# Altium PCB PCB1.PcbDoc (part 3 of 3)
Units mil, origin at the board's own origin, x right, y up, seen from the top; angles counter-clockwise.
Board outline 1929.13 x 1929.13 mil, 2 copper layers (Top Layer, Bottom Layer); 46 components, 43 nets, 184 pads, 94 vias.
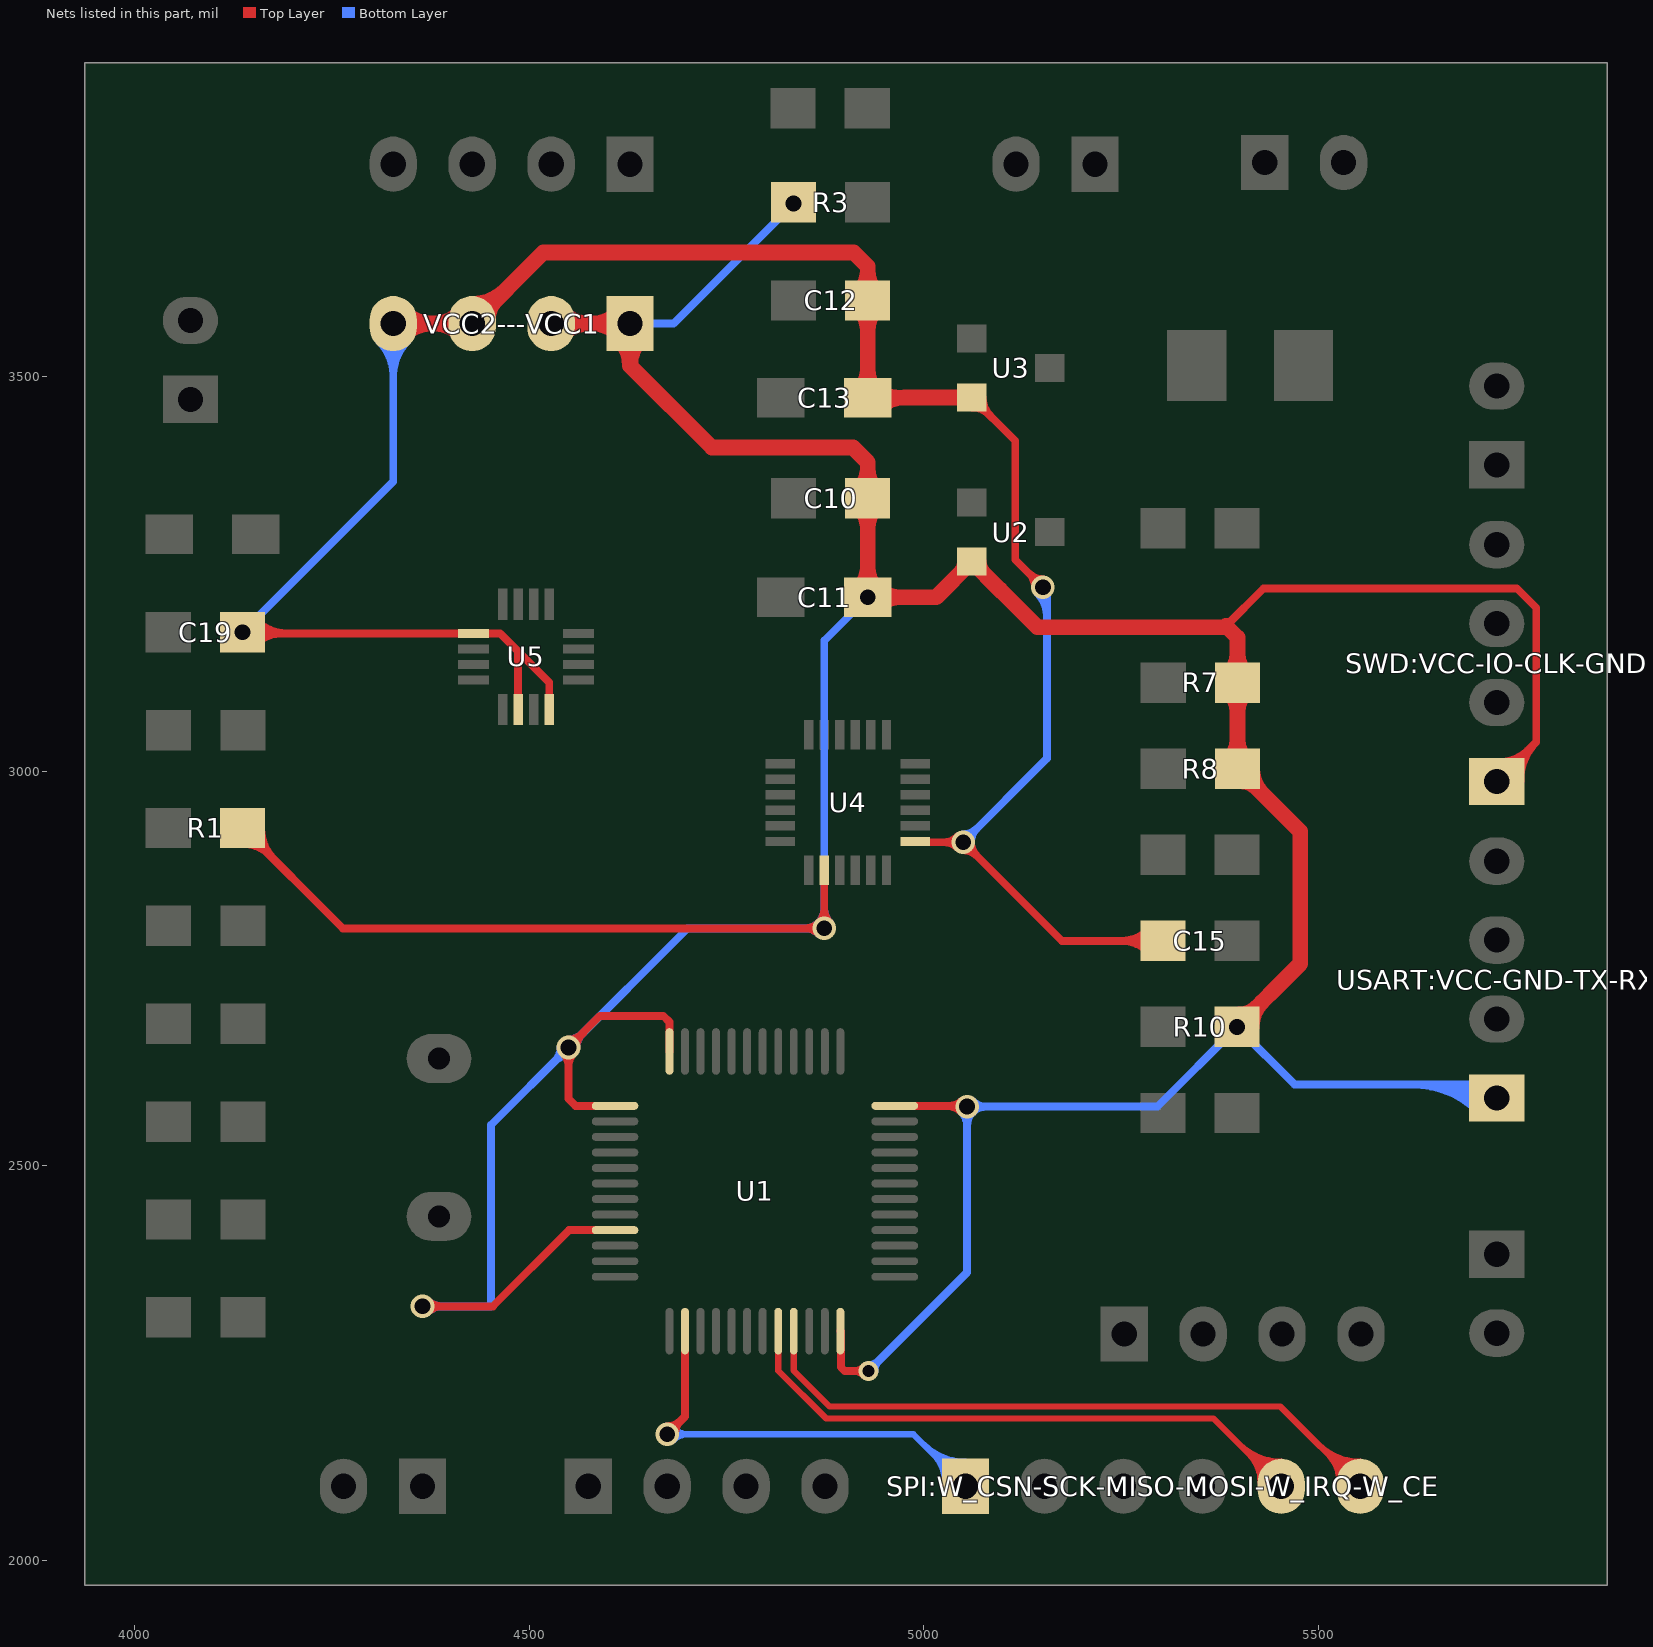
[diagram p3: the nets of this part, all layers, seen from the top]

## Via types
v1: diameter 30, hole 20, Top Layer to Bottom Layer, 54 vias
v2: diameter 19.68, hole 19.68, Top Layer to Bottom Layer, 32 vias
v3: diameter 25, hole 15, Top Layer to Bottom Layer, 4 vias
v4: diameter 196.85, hole 137.8, Top Layer to Bottom Layer, 4 vias

## Nets (pads, with @x,y where several pads share a name; then routed paths per layer and width w, separated by ;. In a path a pad name is that pad's centre, name@x,y a point inside that pad or via, vN(x,y) a via of type N, cw(c..) or ccw(c..) an arc to the next point about the centre after c; other vN are vias at no path point) (continued)
VCC1: C10.2 C11.A R1.1 R3.1 R7.2 R8.2 R10.1 SWD:VCC-IO-CLK-GND.1 U1.1 U1.9 U1.24 U1.36 U1.48 U2.2 U4.8 USART:VCC-GND-TX-RX.1 VCC2---VCC1.1 VCC2---VCC1.2 | length 16163
  Top Layer w10: R1.1@4137,2928 4264.08,2800.92 v1(4874.08,2800.92) U4.8@4874.08,2874.59 ; v1(4365,2322) 4454.12,2322 4550.64,2418.52 U1.9@4609,2418.52 ; U1.1@4609,2576 4559,2576 4550,2585 v1(4550,2650) 4590,2690 4670,2690 4677.9,2682.1 U1.48@4677.9,2644.9 ; U1.24@4894.43,2290.57 4895,2290 4895,2245 4900,2240 v3(4930,2240) ; U1.36@4963.33,2576 v1@5054,2576 ; U2.2@5061,3265.53 U2.2@5068.25,3258.28 ; 5383,3184 5430.66,3231.66 5751.34,3231.66 5776,3207 5776,3037 ; SWD:VCC-IO-CLK-GND.1@5726,2987 5776,3037 ; R1.1@4139.95,2907.41 cw(c4139.95,2864.83) 4170.06,2894.94 ; R1.1@4139.95,2907.41 cw(c4139.95,2864.83) 4170.06,2894.94 ; R1.1@4139.95,2907.41 cw(c4139.95,2864.83) 4170.06,2894.94 ; R1.1@4139.95,2907.41 cw(c4139.95,2864.83) 4170.06,2894.94 ; R1.1@4150.54,2928 ccw(c4183.24,2928) R1.1@4160.12,2904.88 ; R1.1@4150.54,2928 ccw(c4183.24,2928) R1.1@4160.12,2904.88 ; R1.1@4150.54,2928 ccw(c4183.24,2928) R1.1@4160.12,2904.88 ; R1.1@4150.54,2928 ccw(c4183.24,2928) R1.1@4160.12,2904.88 ; R1.1@4160.54,2928 ccw(c4217.38,2928) 4177.19,2887.81 ; R1.1@4160.54,2928 ccw(c4217.38,2928) 4177.19,2887.81 ; R1.1@4160.54,2928 ccw(c4217.38,2928) 4177.19,2887.81 ; R1.1@4160.54,2928 ccw(c4217.38,2928) 4177.19,2887.81 ; v1@4372.07,2314.93 cw(c4389.14,2297.86) 4389.14,2322 ; v1@4372.07,2314.93 cw(c4389.14,2297.86) 4389.14,2322 ; v1@4372.07,2314.93 cw(c4389.14,2297.86) 4389.14,2322 ; v1@4372.07,2314.93 cw(c4389.14,2297.86) 4389.14,2322 ; v1@4372.07,2329.07 ccw(c4389.14,2346.14) 4389.14,2322 ; v1@4372.07,2329.07 ccw(c4389.14,2346.14) 4389.14,2322 ; v1@4372.07,2329.07 ccw(c4389.14,2346.14) 4389.14,2322 ; v1@4372.07,2329.07 ccw(c4389.14,2346.14) 4389.14,2322 ; v1@4542.93,2642.93 cw(c4525.86,2625.86) 4550,2625.86 ; v1@4542.93,2642.93 cw(c4525.86,2625.86) 4550,2625.86 ; v1@4542.93,2642.93 cw(c4525.86,2625.86) 4550,2625.86 ; v1@4542.93,2642.93 cw(c4525.86,2625.86) 4550,2625.86 ; 4550,2625.86 cw(c4574.14,2625.86) v1@4557.07,2642.93 ; 4550,2625.86 cw(c4574.14,2625.86) v1@4557.07,2642.93 ; 4550,2625.86 cw(c4574.14,2625.86) v1@4557.07,2642.93 ; 4550,2625.86 cw(c4574.14,2625.86) v1@4557.07,2642.93 ; 4550,2631.89 cw(c4568.11,2631.89) v1@4555.3,2644.7 ; 4550,2631.89 cw(c4568.11,2631.89) v1@4555.3,2644.7 ; 4550,2631.89 cw(c4568.11,2631.89) v1@4555.3,2644.7 ; 4550,2631.89 cw(c4568.11,2631.89) v1@4555.3,2644.7 ; v1@4550,2657.5 ccw(c4550,2675.61) 4562.8,2662.8 ; v1@4550,2657.5 ccw(c4550,2675.61) 4562.8,2662.8 ; v1@4550,2657.5 ccw(c4550,2675.61) 4562.8,2662.8 ; v1@4550,2657.5 ccw(c4550,2675.61) 4562.8,2662.8 ; v1@4550,2660 ccw(c4550,2684.14) 4567.07,2667.07 ; v1@4550,2660 ccw(c4550,2684.14) 4567.07,2667.07 ; v1@4550,2660 ccw(c4550,2684.14) 4567.07,2667.07 ; v1@4550,2660 ccw(c4550,2684.14) 4567.07,2667.07 ; v1@4557.5,2650 cw(c4575.61,2650) 4562.8,2662.8 ; v1@4557.5,2650 cw(c4575.61,2650) 4562.8,2662.8 ; v1@4557.5,2650 cw(c4575.61,2650) 4562.8,2662.8 ; v1@4557.5,2650 cw(c4575.61,2650) 4562.8,2662.8 ; v1@4560,2650 cw(c4584.14,2650) 4567.07,2667.07 ; v1@4560,2650 cw(c4584.14,2650) 4567.07,2667.07 ; v1@4560,2650 cw(c4584.14,2650) 4567.07,2667.07 ; v1@4560,2650 cw(c4584.14,2650) 4567.07,2667.07 ; 4849.94,2800.92 cw(c4849.94,2776.78) v1@4867.01,2793.85 ; 4849.94,2800.92 ccw(c4849.94,2825.06) v1@4867.01,2807.99 ; 4849.94,2800.92 cw(c4849.94,2776.78) v1@4867.01,2793.85 ; 4849.94,2800.92 ccw(c4849.94,2825.06) v1@4867.01,2807.99 ; 4849.94,2800.92 ccw(c4849.94,2825.06) v1@4867.01,2807.99 ; 4849.94,2800.92 cw(c4849.94,2776.78) v1@4867.01,2793.85 ; 4849.94,2800.92 ccw(c4849.94,2825.06) v1@4867.01,2807.99 ; 4849.94,2800.92 cw(c4849.94,2776.78) v1@4867.01,2793.85 ; v1@4867.01,2807.99 ccw(c4849.94,2825.06) 4874.08,2825.06 ; v1@4867.01,2807.99 ccw(c4849.94,2825.06) 4874.08,2825.06 ; v1@4867.01,2807.99 ccw(c4849.94,2825.06) 4874.08,2825.06 ; v1@4867.01,2807.99 ccw(c4849.94,2825.06) 4874.08,2825.06 ; 4874.08,2825.06 ccw(c4898.22,2825.06) v1@4881.15,2807.99 ; 4874.08,2825.06 ccw(c4898.22,2825.06) v1@4881.15,2807.99 ; 4874.08,2825.06 ccw(c4898.22,2825.06) v1@4881.15,2807.99 ; 4874.08,2825.06 ccw(c4898.22,2825.06) v1@4881.15,2807.99 ; 4911.89,2240 cw(c4911.89,2221.89) v3@4924.7,2234.7 ; 4911.89,2240 ccw(c4911.89,2258.11) v3@4924.7,2245.3 ; 4911.89,2240 cw(c4911.89,2221.89) v3@4924.7,2234.7 ; 4911.89,2240 ccw(c4911.89,2258.11) v3@4924.7,2245.3 ; 4911.89,2240 cw(c4911.89,2221.89) v3@4924.7,2234.7 ; 4911.89,2240 ccw(c4911.89,2258.11) v3@4924.7,2245.3 ; 4911.89,2240 cw(c4911.89,2221.89) v3@4924.7,2234.7 ; 4911.89,2240 ccw(c4911.89,2258.11) v3@4924.7,2245.3 ; 4911.89,2240 cw(c4911.89,2221.89) v3@4924.7,2234.7 ; 4911.89,2240 ccw(c4911.89,2258.11) v3@4924.7,2245.3 ; 4911.89,2240 cw(c4911.89,2221.89) v3@4924.7,2234.7 ; 4911.89,2240 ccw(c4911.89,2258.11) v3@4924.7,2245.3 ; 4911.89,2240 ccw(c4911.89,2258.11) v3@4924.7,2245.3 ; 4911.89,2240 cw(c4911.89,2221.89) v3@4924.7,2234.7 ; 4911.89,2240 ccw(c4911.89,2258.11) v3@4924.7,2245.3 ; 4911.89,2240 cw(c4911.89,2221.89) v3@4924.7,2234.7 ; 5028.44,2576 cw(c5028.44,2548.44) v1@5047.93,2567.93 ; 5028.44,2576 cw(c5028.44,2548.44) v1@5047.93,2567.93 ; 5028.44,2576 cw(c5028.44,2548.44) v1@5047.93,2567.93 ; 5028.44,2576 cw(c5028.44,2548.44) v1@5047.93,2567.93 ; 5033.27,2576 ccw(c5033.27,2596.73) v1@5047.93,2582.07 ; 5033.27,2576 ccw(c5033.27,2596.73) v1@5047.93,2582.07 ; 5033.27,2576 ccw(c5033.27,2596.73) v1@5047.93,2582.07 ; 5033.27,2576 ccw(c5033.27,2596.73) v1@5047.93,2582.07 ; 5034.48,2576 cw(c5034.48,2554.48) v1@5049.7,2569.7 ; 5034.48,2576 cw(c5034.48,2554.48) v1@5049.7,2569.7 ; 5034.48,2576 cw(c5034.48,2554.48) v1@5049.7,2569.7 ; 5034.48,2576 cw(c5034.48,2554.48) v1@5049.7,2569.7 ; 5039.31,2576 ccw(c5039.31,2590.69) v1@5049.7,2580.3 ; 5039.31,2576 ccw(c5039.31,2590.69) v1@5049.7,2580.3 ; 5039.31,2576 ccw(c5039.31,2590.69) v1@5049.7,2580.3 ; 5039.31,2576 ccw(c5039.31,2590.69) v1@5049.7,2580.3 ; SWD:VCC-IO-CLK-GND.1@5726,3007 ccw(c5726,3055.28) 5760.14,3021.14 ; SWD:VCC-IO-CLK-GND.1@5726,3007 ccw(c5726,3055.28) 5760.14,3021.14 ; SWD:VCC-IO-CLK-GND.1@5726,3007 ccw(c5726,3055.28) 5760.14,3021.14 ; SWD:VCC-IO-CLK-GND.1@5726,3007 ccw(c5726,3055.28) 5760.14,3021.14 ; SWD:VCC-IO-CLK-GND.1@5731,3012 ccw(c5731,3060.28) 5765.14,3026.14 ; SWD:VCC-IO-CLK-GND.1@5731,3012 ccw(c5731,3060.28) 5765.14,3026.14 ; SWD:VCC-IO-CLK-GND.1@5731,3012 ccw(c5731,3060.28) 5765.14,3026.14 ; SWD:VCC-IO-CLK-GND.1@5731,3012 ccw(c5731,3060.28) 5765.14,3026.14 ; SWD:VCC-IO-CLK-GND.1@5746,2987 cw(c5794.28,2987) 5760.14,3021.14 ; SWD:VCC-IO-CLK-GND.1@5746,2987 cw(c5794.28,2987) 5760.14,3021.14 ; SWD:VCC-IO-CLK-GND.1@5746,2987 cw(c5794.28,2987) 5760.14,3021.14 ; SWD:VCC-IO-CLK-GND.1@5746,2987 cw(c5794.28,2987) 5760.14,3021.14 ; SWD:VCC-IO-CLK-GND.1@5746,2987.27 cw(c5791.61,2988.09) 5759.35,3020.35 ; SWD:VCC-IO-CLK-GND.1@5746,2987.27 cw(c5791.61,2988.09) 5759.35,3020.35 ; SWD:VCC-IO-CLK-GND.1@5746,2987.27 cw(c5791.61,2988.09) 5759.35,3020.35 ; SWD:VCC-IO-CLK-GND.1@5746,2987.27 cw(c5791.61,2988.09) 5759.35,3020.35 ; SWD:VCC-IO-CLK-GND.1@5756,2987.45 cw(c5824.31,2988.68) 5776,3037 ; SWD:VCC-IO-CLK-GND.1@5756,2987.45 cw(c5824.31,2988.68) 5776,3037 ; SWD:VCC-IO-CLK-GND.1@5756,2987.45 cw(c5824.31,2988.68) 5776,3037 ; SWD:VCC-IO-CLK-GND.1@5756,2987.45 cw(c5824.31,2988.68) 5776,3037
  Top Layer w20: VCC2---VCC1.2@4528,3567 VCC2---VCC1.1@4628,3567 ; 4910.33,3410 4731.72,3410 4628,3513.72 ; 4912,3408.33 4929.06,3391.27 C10.2@4929.06,3345.67 v1(4929.06,3220.33) ; 5381.33,3182.33 5144.2,3182.33 5104.28,3222.25 5096.54,3229.99 U2.2@5061,3265.53 5015.8,3220.33 4969.65,3220.33 ; 5383,3184 5397.57,3169.43 R7.2@5397.57,3112 R8.2@5397.57,3003 5477,2923.57 5477,2756 v1(5397,2676) ; VCC2---VCC1.2@4542.14,3552.86 cw(c4576.28,3518.72) 4576.28,3567 ; VCC2---VCC1.2@4542.14,3552.86 cw(c4576.28,3518.72) 4576.28,3567 ; VCC2---VCC1.2@4542.14,3552.86 cw(c4576.28,3518.72) 4576.28,3567 ; VCC2---VCC1.2@4542.14,3552.86 cw(c4576.28,3518.72) 4576.28,3567 ; VCC2---VCC1.2@4542.14,3552.86 cw(c4576.28,3518.72) 4576.28,3567 ; VCC2---VCC1.2@4542.14,3552.86 cw(c4576.28,3518.72) 4576.28,3567 ; VCC2---VCC1.2@4542.14,3552.86 cw(c4576.28,3518.72) 4576.28,3567 ; VCC2---VCC1.2@4542.14,3552.86 cw(c4576.28,3518.72) 4576.28,3567 ; VCC2---VCC1.2@4542.14,3581.14 ccw(c4576.28,3615.28) 4576.28,3567 ; VCC2---VCC1.2@4542.14,3581.14 ccw(c4576.28,3615.28) 4576.28,3567 ; VCC2---VCC1.2@4542.14,3581.14 ccw(c4576.28,3615.28) 4576.28,3567 ; VCC2---VCC1.2@4542.14,3581.14 ccw(c4576.28,3615.28) 4576.28,3567 ; VCC2---VCC1.2@4542.14,3581.14 ccw(c4576.28,3615.28) 4576.28,3567 ; VCC2---VCC1.2@4542.14,3581.14 ccw(c4576.28,3615.28) 4576.28,3567 ; VCC2---VCC1.2@4542.14,3581.14 ccw(c4576.28,3615.28) 4576.28,3567 ; VCC2---VCC1.2@4542.14,3581.14 ccw(c4576.28,3615.28) 4576.28,3567 ; 4579.72,3567 cw(c4579.72,3518.72) VCC2---VCC1.1@4613.86,3552.86 ; 4579.72,3567 ccw(c4579.72,3615.28) VCC2---VCC1.1@4613.86,3581.14 ; 4579.72,3567 cw(c4579.72,3518.72) VCC2---VCC1.1@4613.86,3552.86 ; 4579.72,3567 ccw(c4579.72,3615.28) VCC2---VCC1.1@4613.86,3581.14 ; 4579.72,3567 cw(c4579.72,3518.72) VCC2---VCC1.1@4613.86,3552.86 ; 4579.72,3567 ccw(c4579.72,3615.28) VCC2---VCC1.1@4613.86,3581.14 ; 4579.72,3567 cw(c4579.72,3518.72) VCC2---VCC1.1@4613.86,3552.86 ; 4579.72,3567 ccw(c4579.72,3615.28) VCC2---VCC1.1@4613.86,3581.14 ; 4579.72,3567 cw(c4579.72,3518.72) VCC2---VCC1.1@4613.86,3552.86 ; 4579.72,3567 ccw(c4579.72,3615.28) VCC2---VCC1.1@4613.86,3581.14 ; 4579.72,3567 cw(c4579.72,3518.72) VCC2---VCC1.1@4613.86,3552.86 ; 4579.72,3567 ccw(c4579.72,3615.28) VCC2---VCC1.1@4613.86,3581.14 ; 4579.72,3567 ccw(c4579.72,3615.28) VCC2---VCC1.1@4613.86,3581.14 ; 4579.72,3567 cw(c4579.72,3518.72) VCC2---VCC1.1@4613.86,3552.86 ; 4579.72,3567 ccw(c4579.72,3615.28) VCC2---VCC1.1@4613.86,3581.14 ; 4579.72,3567 cw(c4579.72,3518.72) VCC2---VCC1.1@4613.86,3552.86 ; VCC2---VCC1.1@4613.86,3547.86 cw(c4579.72,3513.72) 4628,3513.72 ; VCC2---VCC1.1@4613.86,3547.86 cw(c4579.72,3513.72) 4628,3513.72 ; VCC2---VCC1.1@4613.86,3547.86 cw(c4579.72,3513.72) 4628,3513.72 ; VCC2---VCC1.1@4613.86,3547.86 cw(c4579.72,3513.72) 4628,3513.72 ; 4628,3513.72 cw(c4676.28,3513.72) VCC2---VCC1.1@4642.14,3547.86 ; 4628,3513.72 cw(c4676.28,3513.72) VCC2---VCC1.1@4642.14,3547.86 ; 4628,3513.72 cw(c4676.28,3513.72) VCC2---VCC1.1@4642.14,3547.86 ; 4628,3513.72 cw(c4676.28,3513.72) VCC2---VCC1.1@4642.14,3547.86 ; C11.A@4918.04,3231.36 ccw(c4891.42,3257.97) 4929.06,3257.97 ; C11.A@4918.04,3231.36 ccw(c4891.42,3257.97) 4929.06,3257.97 ; C11.A@4918.04,3231.36 ccw(c4891.42,3257.97) 4929.06,3257.97 ; C11.A@4918.04,3231.36 ccw(c4891.42,3257.97) 4929.06,3257.97 ; C10.2@4918.04,3334.64 cw(c4891.42,3308.03) 4929.06,3308.03 ; C10.2@4918.04,3334.64 cw(c4891.42,3308.03) 4929.06,3308.03 ; C10.2@4918.04,3334.64 cw(c4891.42,3308.03) 4929.06,3308.03 ; C10.2@4918.04,3334.64 cw(c4891.42,3308.03) 4929.06,3308.03 ; C10.2@4918.04,3356.69 ccw(c4891.42,3383.31) 4929.06,3383.31 ; C10.2@4918.04,3356.69 ccw(c4891.42,3383.31) 4929.06,3383.31 ; C10.2@4918.04,3356.69 ccw(c4891.42,3383.31) 4929.06,3383.31 ; C10.2@4918.04,3356.69 ccw(c4891.42,3383.31) 4929.06,3383.31 ; 4929.06,3257.97 ccw(c4966.7,3257.97) C11.A@4940.09,3231.36 ; 4929.06,3257.97 ccw(c4966.7,3257.97) C11.A@4940.09,3231.36 ; 4929.06,3257.97 ccw(c4966.7,3257.97) C11.A@4940.09,3231.36 ; 4929.06,3257.97 ccw(c4966.7,3257.97) C11.A@4940.09,3231.36 ; 4929.06,3308.03 cw(c4966.7,3308.03) C10.2@4940.09,3334.64 ; 4929.06,3308.03 cw(c4966.7,3308.03) C10.2@4940.09,3334.64 ; 4929.06,3308.03 cw(c4966.7,3308.03) C10.2@4940.09,3334.64 ; 4929.06,3308.03 cw(c4966.7,3308.03) C10.2@4940.09,3334.64 ; 4929.06,3383.31 ccw(c4966.7,3383.31) C10.2@4940.09,3356.69 ; 4929.06,3383.31 ccw(c4966.7,3383.31) C10.2@4940.09,3356.69 ; 4929.06,3383.31 ccw(c4966.7,3383.31) C10.2@4940.09,3356.69 ; 4929.06,3383.31 ccw(c4966.7,3383.31) C10.2@4940.09,3356.69 ; C11.A@4943.04,3209.31 cw(c4969.65,3182.69) 4969.65,3220.33 ; C11.A@4943.04,3209.31 cw(c4969.65,3182.69) 4969.65,3220.33 ; C11.A@4943.04,3209.31 cw(c4969.65,3182.69) 4969.65,3220.33 ; C11.A@4943.04,3231.36 ccw(c4969.65,3257.97) 4969.65,3220.33 ; C11.A@4943.04,3231.36 ccw(c4969.65,3257.97) 4969.65,3220.33 ; C11.A@4943.04,3231.36 ccw(c4969.65,3257.97) 4969.65,3220.33 ; U2.2@5046.15,3250.68 ccw(c5031.29,3265.53) U2.2@5052.3,3265.53 ; U2.2@5046.15,3250.68 ccw(c5031.29,3265.53) U2.2@5052.3,3265.53 ; U2.2@5046.15,3250.68 ccw(c5031.29,3265.53) U2.2@5052.3,3265.53 ; U2.2@5046.15,3250.68 ccw(c5031.29,3265.53) U2.2@5052.3,3265.53 ; U2.2@5069.7,3265.53 ccw(c5090.71,3265.53) U2.2@5075.85,3250.68 ; U2.2@5069.7,3265.53 ccw(c5090.71,3265.53) U2.2@5075.85,3250.68 ; U2.2@5069.7,3265.53 ccw(c5090.71,3265.53) U2.2@5075.85,3250.68 ; U2.2@5069.7,3265.53 ccw(c5090.71,3265.53) U2.2@5075.85,3250.68 ; U2.2@5069.7,3265.53 ccw(c5090.71,3265.53) U2.2@5075.85,3250.68 ; U2.2@5069.7,3265.53 ccw(c5090.71,3265.53) U2.2@5075.85,3250.68 ; U2.2@5069.7,3265.53 ccw(c5090.71,3265.53) U2.2@5075.85,3250.68 ; U2.2@5069.7,3265.53 ccw(c5090.71,3265.53) U2.2@5075.85,3250.68 ; R8.2@5386.54,3014.02 ccw(c5359.93,3040.64) 5397.57,3040.64 ; R8.2@5386.54,3014.02 ccw(c5359.93,3040.64) 5397.57,3040.64 ; R8.2@5386.54,3014.02 ccw(c5359.93,3040.64) 5397.57,3040.64 ; R8.2@5386.54,3014.02 ccw(c5359.93,3040.64) 5397.57,3040.64 ; R7.2@5386.54,3100.98 cw(c5359.93,3074.36) 5397.57,3074.36 ; R7.2@5386.54,3100.98 cw(c5359.93,3074.36) 5397.57,3074.36 ; R7.2@5386.54,3100.98 cw(c5359.93,3074.36) 5397.57,3074.36 ; R7.2@5386.54,3100.98 cw(c5359.93,3074.36) 5397.57,3074.36 ; R7.2@5386.54,3123.02 ccw(c5359.93,3149.64) 5397.57,3149.64 ; R7.2@5386.54,3123.02 ccw(c5359.93,3149.64) 5397.57,3149.64 ; R7.2@5386.54,3123.02 ccw(c5359.93,3149.64) 5397.57,3149.64 ; R7.2@5386.54,3123.02 ccw(c5359.93,3149.64) 5397.57,3149.64 ; 5397.57,3040.64 ccw(c5435.2,3040.64) R8.2@5408.59,3014.02 ; 5397.57,3040.64 ccw(c5435.2,3040.64) R8.2@5408.59,3014.02 ; 5397.57,3040.64 ccw(c5435.2,3040.64) R8.2@5408.59,3014.02 ; 5397.57,3040.64 ccw(c5435.2,3040.64) R8.2@5408.59,3014.02 ; 5397.57,3074.36 cw(c5435.2,3074.36) R7.2@5408.59,3100.98 ; 5397.57,3074.36 cw(c5435.2,3074.36) R7.2@5408.59,3100.98 ; 5397.57,3074.36 cw(c5435.2,3074.36) R7.2@5408.59,3100.98 ; 5397.57,3074.36 cw(c5435.2,3074.36) R7.2@5408.59,3100.98 ; 5397.57,3149.64 ccw(c5435.2,3149.64) R7.2@5408.59,3123.02 ; 5397.57,3149.64 ccw(c5435.2,3149.64) R7.2@5408.59,3123.02 ; 5397.57,3149.64 ccw(c5435.2,3149.64) R7.2@5408.59,3123.02 ; 5397.57,3149.64 ccw(c5435.2,3149.64) R7.2@5408.59,3123.02 ; R10.1@5399.95,2691.59 ccw(c5399.95,2722.1) R10.1@5421.53,2700.53 ; R10.1@5399.95,2691.59 ccw(c5399.95,2722.1) R10.1@5421.53,2700.53 ; R10.1@5399.95,2691.59 ccw(c5399.95,2722.1) R10.1@5421.53,2700.53 ; R10.1@5399.95,2691.59 ccw(c5399.95,2722.1) R10.1@5421.53,2700.53 ; R8.2@5400.52,2987.41 cw(c5400.52,2956.9) R8.2@5422.09,2978.47 ; R8.2@5400.52,2987.41 cw(c5400.52,2956.9) R8.2@5422.09,2978.47 ; R8.2@5400.52,2987.41 cw(c5400.52,2956.9) R8.2@5422.09,2978.47 ; R8.2@5400.52,2987.41 cw(c5400.52,2956.9) R8.2@5422.09,2978.47 ; R10.1@5415.54,2676 cw(c5460.31,2676) 5428.66,2707.66 ; R10.1@5415.54,2676 cw(c5460.31,2676) 5428.66,2707.66 ; R10.1@5415.54,2676 cw(c5460.31,2676) 5428.66,2707.66 ; R10.1@5415.54,2676 cw(c5460.31,2676) 5428.66,2707.66 ; R8.2@5416.11,3003 ccw(c5460.88,3003) 5429.22,2971.34 ; R8.2@5416.11,3003 ccw(c5460.88,3003) 5429.22,2971.34 ; R8.2@5416.11,3003 ccw(c5460.88,3003) 5429.22,2971.34 ; R8.2@5416.11,3003 ccw(c5460.88,3003) 5429.22,2971.34
  Bottom Layer w10: v1(4365,2322) 4452,2322 4452,2552 v1(4550,2650) 4700.92,2800.92 v1(4874.08,2800.92) 4874.08,3165.35 4911.99,3203.26 ; VCC2---VCC1.1@4628,3567 4683,3567 v1(4835,3719) ; v3(4930,2240) 5055,2365 v1(5055,2575) 5296,2575 v1(5397,2676) 5470,2603 5709,2603 USART:VCC-GND-TX-RX.1@5726,2586 ; v1@4372.07,2314.93 cw(c4389.14,2297.86) 4389.14,2322 ; v1@4372.07,2314.93 cw(c4389.14,2297.86) 4389.14,2322 ; v1@4372.07,2314.93 cw(c4389.14,2297.86) 4389.14,2322 ; v1@4372.07,2314.93 cw(c4389.14,2297.86) 4389.14,2322 ; v1@4372.07,2329.07 ccw(c4389.14,2346.14) 4389.14,2322 ; v1@4372.07,2329.07 ccw(c4389.14,2346.14) 4389.14,2322 ; v1@4372.07,2329.07 ccw(c4389.14,2346.14) 4389.14,2322 ; v1@4372.07,2329.07 ccw(c4389.14,2346.14) 4389.14,2322 ; 4532.93,2632.93 cw(c4550,2615.86) v1@4550,2640 ; 4532.93,2632.93 ccw(c4515.86,2650) v1@4540,2650 ; 4532.93,2632.93 cw(c4550,2615.86) v1@4550,2640 ; 4532.93,2632.93 ccw(c4515.86,2650) v1@4540,2650 ; 4532.93,2632.93 ccw(c4515.86,2650) v1@4540,2650 ; 4532.93,2632.93 cw(c4550,2615.86) v1@4550,2640 ; 4532.93,2632.93 ccw(c4515.86,2650) v1@4540,2650 ; 4532.93,2632.93 cw(c4550,2615.86) v1@4550,2640 ; v1@4550,2657.5 ccw(c4550,2675.61) 4562.8,2662.8 ; v1@4550,2657.5 ccw(c4550,2675.61) 4562.8,2662.8 ; v1@4550,2657.5 ccw(c4550,2675.61) 4562.8,2662.8 ; v1@4550,2657.5 ccw(c4550,2675.61) 4562.8,2662.8 ; v1@4550,2660 ccw(c4550,2684.14) 4567.07,2667.07 ; v1@4550,2660 ccw(c4550,2684.14) 4567.07,2667.07 ; v1@4550,2660 ccw(c4550,2684.14) 4567.07,2667.07 ; v1@4550,2660 ccw(c4550,2684.14) 4567.07,2667.07 ; v1@4557.5,2650 cw(c4575.61,2650) 4562.8,2662.8 ; v1@4557.5,2650 cw(c4575.61,2650) 4562.8,2662.8 ; v1@4557.5,2650 cw(c4575.61,2650) 4562.8,2662.8 ; v1@4557.5,2650 cw(c4575.61,2650) 4562.8,2662.8 ; v1@4560,2650 cw(c4584.14,2650) 4567.07,2667.07 ; v1@4560,2650 cw(c4584.14,2650) 4567.07,2667.07 ; v1@4560,2650 cw(c4584.14,2650) 4567.07,2667.07 ; v1@4560,2650 cw(c4584.14,2650) 4567.07,2667.07 ; 4849.94,2800.92 cw(c4849.94,2776.78) v1@4867.01,2793.85 ; 4849.94,2800.92 ccw(c4849.94,2825.06) v1@4867.01,2807.99 ; 4849.94,2800.92 cw(c4849.94,2776.78) v1@4867.01,2793.85 ; 4849.94,2800.92 ccw(c4849.94,2825.06) v1@4867.01,2807.99 ; 4849.94,2800.92 ccw(c4849.94,2825.06) v1@4867.01,2807.99 ; 4849.94,2800.92 cw(c4849.94,2776.78) v1@4867.01,2793.85 ; 4849.94,2800.92 ccw(c4849.94,2825.06) v1@4867.01,2807.99 ; 4849.94,2800.92 cw(c4849.94,2776.78) v1@4867.01,2793.85 ; v1@4867.01,2807.99 ccw(c4849.94,2825.06) 4874.08,2825.06 ; v1@4867.01,2807.99 ccw(c4849.94,2825.06) 4874.08,2825.06 ; v1@4867.01,2807.99 ccw(c4849.94,2825.06) 4874.08,2825.06 ; v1@4867.01,2807.99 ccw(c4849.94,2825.06) 4874.08,2825.06 ; 4874.08,2825.06 ccw(c4898.22,2825.06) v1@4881.15,2807.99 ; 4874.08,2825.06 ccw(c4898.22,2825.06) v1@4881.15,2807.99 ; 4874.08,2825.06 ccw(c4898.22,2825.06) v1@4881.15,2807.99 ; 4874.08,2825.06 ccw(c4898.22,2825.06) v1@4881.15,2807.99 ; 4911.99,3203.26 cw(c4929.06,3186.19) v1@4929.06,3210.33 ; 4911.99,3203.26 ccw(c4894.92,3220.33) v1@4919.06,3220.33 ; 4911.99,3203.26 ccw(c4894.92,3220.33) v1@4919.06,3220.33 ; 4911.99,3203.26 cw(c4929.06,3186.19) v1@4929.06,3210.33 ; 4911.99,3203.26 ccw(c4894.92,3220.33) v1@4919.06,3220.33 ; 4911.99,3203.26 cw(c4929.06,3186.19) v1@4929.06,3210.33 ; v3@4930,2247.5 ccw(c4930,2265.61) 4942.8,2252.8 ; v3@4930,2247.5 ccw(c4930,2265.61) 4942.8,2252.8 ; v3@4930,2247.5 ccw(c4930,2265.61) 4942.8,2252.8 ; v3@4930,2247.5 ccw(c4930,2265.61) 4942.8,2252.8 ; v3@4930,2247.5 ccw(c4930,2265.61) 4942.8,2252.8 ; v3@4930,2247.5 ccw(c4930,2265.61) 4942.8,2252.8 ; v3@4930,2247.5 ccw(c4930,2265.61) 4942.8,2252.8 ; v3@4930,2247.5 ccw(c4930,2265.61) 4942.8,2252.8 ; v3@4937.5,2240 cw(c4955.61,2240) 4942.8,2252.8 ; v3@4937.5,2240 cw(c4955.61,2240) 4942.8,2252.8 ; v3@4937.5,2240 cw(c4955.61,2240) 4942.8,2252.8 ; v3@4937.5,2240 cw(c4955.61,2240) 4942.8,2252.8 ; v3@4937.5,2240 cw(c4955.61,2240) 4942.8,2252.8 ; v3@4937.5,2240 cw(c4955.61,2240) 4942.8,2252.8 ; v3@4937.5,2240 cw(c4955.61,2240) 4942.8,2252.8 ; v3@4937.5,2240 cw(c4955.61,2240) 4942.8,2252.8 ; v1@5047.93,2567.93 cw(c5030.86,2550.86) 5055,2550.86 ; v1@5047.93,2567.93 cw(c5030.86,2550.86) 5055,2550.86 ; v1@5047.93,2567.93 cw(c5030.86,2550.86) 5055,2550.86 ; v1@5047.93,2567.93 cw(c5030.86,2550.86) 5055,2550.86 ; v1@5049.7,2569.7 cw(c5036.89,2556.89) 5055,2556.89 ; v1@5049.7,2569.7 cw(c5036.89,2556.89) 5055,2556.89 ; v1@5049.7,2569.7 cw(c5036.89,2556.89) 5055,2556.89 ; v1@5049.7,2569.7 cw(c5036.89,2556.89) 5055,2556.89 ; 5055,2550.86 cw(c5079.14,2550.86) v1@5062.07,2567.93 ; 5055,2550.86 cw(c5079.14,2550.86) v1@5062.07,2567.93 ; 5055,2550.86 cw(c5079.14,2550.86) v1@5062.07,2567.93 ; 5055,2550.86 cw(c5079.14,2550.86) v1@5062.07,2567.93 ; 5055,2556.89 cw(c5073.11,2556.89) v1@5060.3,2569.7 ; 5055,2556.89 cw(c5073.11,2556.89) v1@5060.3,2569.7 ; 5055,2556.89 cw(c5073.11,2556.89) v1@5060.3,2569.7 ; 5055,2556.89 cw(c5073.11,2556.89) v1@5060.3,2569.7 ; v1@5060.3,2569.7 cw(c5073.11,2556.89) 5073.11,2575 ; v1@5060.3,2569.7 cw(c5073.11,2556.89) 5073.11,2575 ; v1@5060.3,2569.7 cw(c5073.11,2556.89) 5073.11,2575 ; v1@5060.3,2569.7 cw(c5073.11,2556.89) 5073.11,2575 ; v1@5060.3,2580.3 ccw(c5073.11,2593.11) 5073.11,2575 ; v1@5060.3,2580.3 ccw(c5073.11,2593.11) 5073.11,2575 ; v1@5060.3,2580.3 ccw(c5073.11,2593.11) 5073.11,2575 ; v1@5060.3,2580.3 ccw(c5073.11,2593.11) 5073.11,2575 ; v1@5062.07,2567.93 cw(c5079.14,2550.86) 5079.14,2575 ; v1@5062.07,2567.93 cw(c5079.14,2550.86) 5079.14,2575 ; v1@5062.07,2567.93 cw(c5079.14,2550.86) 5079.14,2575 ; v1@5062.07,2567.93 cw(c5079.14,2550.86) 5079.14,2575 ; v1@5062.07,2582.07 ccw(c5079.14,2599.14) 5079.14,2575 ; v1@5062.07,2582.07 ccw(c5079.14,2599.14) 5079.14,2575 ; v1@5062.07,2582.07 ccw(c5079.14,2599.14) 5079.14,2575 ; v1@5062.07,2582.07 ccw(c5079.14,2599.14) 5079.14,2575 ; 5379.93,2658.93 cw(c5397,2641.86) v1@5397,2666 ; 5379.93,2658.93 ccw(c5362.86,2676) v1@5387,2676 ; 5379.93,2658.93 cw(c5397,2641.86) v1@5397,2666 ; 5379.93,2658.93 ccw(c5362.86,2676) v1@5387,2676 ; 5379.93,2658.93 ccw(c5362.86,2676) v1@5387,2676 ; 5379.93,2658.93 cw(c5397,2641.86) v1@5397,2666 ; 5379.93,2658.93 ccw(c5362.86,2676) v1@5387,2676 ; 5379.93,2658.93 cw(c5397,2641.86) v1@5397,2666 ; v1@5397,2666 cw(c5397,2641.86) 5414.07,2658.93 ; v1@5397,2666 cw(c5397,2641.86) 5414.07,2658.93 ; v1@5397,2666 cw(c5397,2641.86) 5414.07,2658.93 ; v1@5397,2666 cw(c5397,2641.86) 5414.07,2658.93 ; v1@5407,2676 ccw(c5431.14,2676) 5414.07,2658.93 ; v1@5407,2676 ccw(c5431.14,2676) 5414.07,2658.93 ; v1@5407,2676 ccw(c5431.14,2676) 5414.07,2658.93 ; v1@5407,2676 ccw(c5431.14,2676) 5414.07,2658.93 ; 5619.6,2603 cw(c5619.6,2484.6) USART:VCC-GND-TX-RX.1@5703.32,2568.32 ; 5619.6,2603 cw(c5619.6,2484.6) USART:VCC-GND-TX-RX.1@5703.32,2568.32 ; 5619.6,2603 cw(c5619.6,2484.6) USART:VCC-GND-TX-RX.1@5703.32,2568.32 ; 5619.6,2603 cw(c5619.6,2484.6) USART:VCC-GND-TX-RX.1@5703.32,2568.32 ; 5643.75,2603 cw(c5643.75,2508.75) USART:VCC-GND-TX-RX.1@5710.39,2575.39 ; 5643.75,2603 cw(c5643.75,2508.75) USART:VCC-GND-TX-RX.1@5710.39,2575.39 ; 5643.75,2603 cw(c5643.75,2508.75) USART:VCC-GND-TX-RX.1@5710.39,2575.39 ; 5643.75,2603 cw(c5643.75,2508.75) USART:VCC-GND-TX-RX.1@5710.39,2575.39 ; 5667.89,2603 cw(c5667.89,2532.89) USART:VCC-GND-TX-RX.1@5717.46,2582.46 ; 5667.89,2603 cw(c5667.89,2532.89) USART:VCC-GND-TX-RX.1@5717.46,2582.46 ; 5667.89,2603 cw(c5667.89,2532.89) USART:VCC-GND-TX-RX.1@5717.46,2582.46 ; 5667.89,2603 cw(c5667.89,2532.89) USART:VCC-GND-TX-RX.1@5717.46,2582.46 ; USART:VCC-GND-TX-RX.1@5692.03,2603 cw(c5692.03,2557.03) USART:VCC-GND-TX-RX.1@5724.54,2589.54 ; USART:VCC-GND-TX-RX.1@5692.03,2603 cw(c5692.03,2557.03) USART:VCC-GND-TX-RX.1@5724.54,2589.54 ; USART:VCC-GND-TX-RX.1@5692.03,2603 cw(c5692.03,2557.03) USART:VCC-GND-TX-RX.1@5724.54,2589.54 ; USART:VCC-GND-TX-RX.1@5692.03,2603 cw(c5692.03,2557.03) USART:VCC-GND-TX-RX.1@5724.54,2589.54
VCC2: C12.2 C13.A C15.2 C19.1 U3.2 U4.13 U5.2 U5.4 U5.13 VCC2---VCC1.3 VCC2---VCC1.4 | length 7489.3
  Top Layer w10: v1(4137,3176) 4138.55,3174.45 U5.13@4429.52,3174.45 4463.45,3174.45 4486.25,3151.64 ; U5.2@4486.25,3078.35 4486.25,3151.64 ; U5.4@4525.62,3078.35 4525.62,3112.27 4486.25,3151.64 ; U4.13@4990.24,2910 v1(5050,2910) ; U3.2@5061,3473.53 5116,3418.53 5116,3268 v1(5151,3233) ; U3.2@5061.98,3460.81 cw(c5061.98,3432.49) 5082.01,3452.52 ; U3.2@5074.7,3473.53 ccw(c5107.78,3473.53) 5084.39,3450.14 ; v1@5141,3233 ccw(c5116.86,3233) 5133.93,3250.07 ccw(c5151,3267.14) v1@5151,3243 ; C15.2@5302.94,2785 5175,2785 5062.8,2897.2 ; 5025.86,2910 cw(c5025.86,2885.86) v1@5042.93,2902.93 ; 5025.86,2910 ccw(c5025.86,2934.14) v1@5042.93,2917.07 ; 5025.86,2910 cw(c5025.86,2885.86) v1@5042.93,2902.93 ; 5025.86,2910 ccw(c5025.86,2934.14) v1@5042.93,2917.07 ; 5025.86,2910 ccw(c5025.86,2934.14) v1@5042.93,2917.07 ; 5025.86,2910 cw(c5025.86,2885.86) v1@5042.93,2902.93 ; 5025.86,2910 ccw(c5025.86,2934.14) v1@5042.93,2917.07 ; 5025.86,2910 cw(c5025.86,2885.86) v1@5042.93,2902.93 ; 5031.89,2910 cw(c5031.89,2891.89) v1@5044.7,2904.7 ; 5031.89,2910 ccw(c5031.89,2928.11) v1@5044.7,2915.3 ; 5031.89,2910 cw(c5031.89,2891.89) v1@5044.7,2904.7 ; 5031.89,2910 ccw(c5031.89,2928.11) v1@5044.7,2915.3 ; 5031.89,2910 cw(c5031.89,2891.89) v1@5044.7,2904.7 ; 5031.89,2910 ccw(c5031.89,2928.11) v1@5044.7,2915.3 ; 5031.89,2910 cw(c5031.89,2891.89) v1@5044.7,2904.7 ; 5031.89,2910 ccw(c5031.89,2928.11) v1@5044.7,2915.3 ; v1@5050,2900 cw(c5050,2875.86) 5067.07,2892.93 ; v1@5050,2900 cw(c5050,2875.86) 5067.07,2892.93 ; v1@5050,2900 cw(c5050,2875.86) 5067.07,2892.93 ; v1@5050,2900 cw(c5050,2875.86) 5067.07,2892.93 ; v1@5050,2902.5 cw(c5050,2884.39) 5062.8,2897.2 ; v1@5050,2902.5 cw(c5050,2884.39) 5062.8,2897.2 ; v1@5050,2902.5 cw(c5050,2884.39) 5062.8,2897.2 ; v1@5050,2902.5 cw(c5050,2884.39) 5062.8,2897.2 ; v1@5057.5,2910 ccw(c5075.61,2910) 5062.8,2897.2 ; v1@5057.5,2910 ccw(c5075.61,2910) 5062.8,2897.2 ; v1@5057.5,2910 ccw(c5075.61,2910) 5062.8,2897.2 ; v1@5057.5,2910 ccw(c5075.61,2910) 5062.8,2897.2 ; v1@5060,2910 ccw(c5084.14,2910) 5067.07,2892.93 ; v1@5060,2910 ccw(c5084.14,2910) 5067.07,2892.93 ; v1@5060,2910 ccw(c5084.14,2910) 5067.07,2892.93 ; v1@5060,2910 ccw(c5084.14,2910) 5067.07,2892.93 ; 5250.28,2785 cw(c5250.28,2735.29) C15.2@5285.43,2770.44 ; 5250.28,2785 ccw(c5250.28,2834.71) C15.2@5285.43,2799.56 ; 5250.28,2785 cw(c5250.28,2735.29) C15.2@5285.43,2770.44 ; 5250.28,2785 ccw(c5250.28,2834.71) C15.2@5285.43,2799.56 ; 5250.28,2785 ccw(c5250.28,2834.71) C15.2@5285.43,2799.56 ; 5250.28,2785 cw(c5250.28,2735.29) C15.2@5285.43,2770.44 ; 5250.28,2785 ccw(c5250.28,2834.71) C15.2@5285.43,2799.56 ; 5250.28,2785 cw(c5250.28,2735.29) C15.2@5285.43,2770.44 ; C19.1@4144.07,3168.93 cw(c4157.4,3155.6) 4157.4,3174.45 ccw(c4157.4,3155.6) C19.1@4144.07,3168.93 ; C19.1@4144.07,3183.07 ccw(c4164.89,3203.89) 4164.89,3174.45 cw(c4164.89,3203.89) C19.1@4144.07,3183.07 ; C19.1@4147.44,3183.49 ccw(c4169.27,3205.31) 4169.27,3174.45 cw(c4169.27,3205.31) C19.1@4147.44,3183.49 ; C19.1@4154.51,3161.44 cw(c4185.92,3130.04) 4185.92,3174.45 ccw(c4185.92,3130.04) C19.1@4154.51,3161.44 ; C19.1@4154.51,3190.56 ccw(c4193.41,3229.46) 4193.41,3174.45 cw(c4193.41,3229.46) C19.1@4154.51,3190.56
  Top Layer w20: VCC2---VCC1.4@4328,3567 VCC2---VCC1.3@4428,3567 4518,3657 4911.33,3657 ; 4913,3655.33 4929.06,3639.27 C12.2@4929.06,3596.33 C13.A@4929.06,3471 ; VCC2---VCC1.4@4342.14,3552.86 cw(c4376.28,3518.72) 4376.28,3567 ; VCC2---VCC1.4@4342.14,3552.86 cw(c4376.28,3518.72) 4376.28,3567 ; VCC2---VCC1.4@4342.14,3552.86 cw(c4376.28,3518.72) 4376.28,3567 ; VCC2---VCC1.4@4342.14,3552.86 cw(c4376.28,3518.72) 4376.28,3567 ; VCC2---VCC1.4@4342.14,3552.86 cw(c4376.28,3518.72) 4376.28,3567 ; VCC2---VCC1.4@4342.14,3552.86 cw(c4376.28,3518.72) 4376.28,3567 ; VCC2---VCC1.4@4342.14,3552.86 cw(c4376.28,3518.72) 4376.28,3567 ; VCC2---VCC1.4@4342.14,3552.86 cw(c4376.28,3518.72) 4376.28,3567 ; VCC2---VCC1.4@4342.14,3581.14 ccw(c4376.28,3615.28) 4376.28,3567 ; VCC2---VCC1.4@4342.14,3581.14 ccw(c4376.28,3615.28) 4376.28,3567 ; VCC2---VCC1.4@4342.14,3581.14 ccw(c4376.28,3615.28) 4376.28,3567 ; VCC2---VCC1.4@4342.14,3581.14 ccw(c4376.28,3615.28) 4376.28,3567 ; VCC2---VCC1.4@4342.14,3581.14 ccw(c4376.28,3615.28) 4376.28,3567 ; VCC2---VCC1.4@4342.14,3581.14 ccw(c4376.28,3615.28) 4376.28,3567 ; VCC2---VCC1.4@4342.14,3581.14 ccw(c4376.28,3615.28) 4376.28,3567 ; VCC2---VCC1.4@4342.14,3581.14 ccw(c4376.28,3615.28) 4376.28,3567 ; 4379.72,3567 cw(c4379.72,3518.72) VCC2---VCC1.3@4413.86,3552.86 ; 4379.72,3567 ccw(c4379.72,3615.28) VCC2---VCC1.3@4413.86,3581.14 ; 4379.72,3567 cw(c4379.72,3518.72) VCC2---VCC1.3@4413.86,3552.86 ; 4379.72,3567 ccw(c4379.72,3615.28) VCC2---VCC1.3@4413.86,3581.14 ; 4379.72,3567 cw(c4379.72,3518.72) VCC2---VCC1.3@4413.86,3552.86 ; 4379.72,3567 ccw(c4379.72,3615.28) VCC2---VCC1.3@4413.86,3581.14 ; 4379.72,3567 cw(c4379.72,3518.72) VCC2---VCC1.3@4413.86,3552.86 ; 4379.72,3567 ccw(c4379.72,3615.28) VCC2---VCC1.3@4413.86,3581.14 ; 4379.72,3567 cw(c4379.72,3518.72) VCC2---VCC1.3@4413.86,3552.86 ; 4379.72,3567 ccw(c4379.72,3615.28) VCC2---VCC1.3@4413.86,3581.14 ; 4379.72,3567 cw(c4379.72,3518.72) VCC2---VCC1.3@4413.86,3552.86 ; 4379.72,3567 ccw(c4379.72,3615.28) VCC2---VCC1.3@4413.86,3581.14 ; 4379.72,3567 ccw(c4379.72,3615.28) VCC2---VCC1.3@4413.86,3581.14 ; 4379.72,3567 cw(c4379.72,3518.72) VCC2---VCC1.3@4413.86,3552.86 ; 4379.72,3567 ccw(c4379.72,3615.28) VCC2---VCC1.3@4413.86,3581.14 ; 4379.72,3567 cw(c4379.72,3518.72) VCC2---VCC1.3@4413.86,3552.86 ; VCC2---VCC1.3@4428,3592 ccw(c4428,3652.36) 4470.68,3609.68 ; VCC2---VCC1.3@4428,3592 ccw(c4428,3652.36) 4470.68,3609.68 ; VCC2---VCC1.3@4428,3592 ccw(c4428,3652.36) 4470.68,3609.68 ; VCC2---VCC1.3@4428,3592 ccw(c4428,3652.36) 4470.68,3609.68 ; VCC2---VCC1.3@4428,3592 ccw(c4428,3652.36) 4470.68,3609.68 ; VCC2---VCC1.3@4428,3592 ccw(c4428,3652.36) 4470.68,3609.68 ; VCC2---VCC1.3@4428,3592 ccw(c4428,3652.36) 4470.68,3609.68 ; VCC2---VCC1.3@4428,3592 ccw(c4428,3652.36) 4470.68,3609.68 ; VCC2---VCC1.3@4448,3572 cw(c4484.21,3572) 4458.61,3597.61 ; VCC2---VCC1.3@4448,3572 cw(c4484.21,3572) 4458.61,3597.61 ; VCC2---VCC1.3@4448,3572 cw(c4484.21,3572) 4458.61,3597.61 ; VCC2---VCC1.3@4448,3572 cw(c4484.21,3572) 4458.61,3597.61 ; VCC2---VCC1.3@4448,3572 cw(c4484.21,3572) 4458.61,3597.61 ; VCC2---VCC1.3@4448,3572 cw(c4484.21,3572) 4458.61,3597.61 ; VCC2---VCC1.3@4448,3572 cw(c4484.21,3572) 4458.61,3597.61 ; VCC2---VCC1.3@4448,3572 cw(c4484.21,3572) 4458.61,3597.61 ; C13.A@4918.04,3482.02 ccw(c4891.42,3508.64) 4929.06,3508.64 ; C13.A@4918.04,3482.02 ccw(c4891.42,3508.64) 4929.06,3508.64 ; C13.A@4918.04,3482.02 ccw(c4891.42,3508.64) 4929.06,3508.64 ; C13.A@4918.04,3482.02 ccw(c4891.42,3508.64) 4929.06,3508.64 ; C12.2@4918.04,3585.31 cw(c4891.42,3558.69) 4929.06,3558.69 ; C12.2@4918.04,3585.31 cw(c4891.42,3558.69) 4929.06,3558.69 ; C12.2@4918.04,3585.31 cw(c4891.42,3558.69) 4929.06,3558.69 ; C12.2@4918.04,3585.31 cw(c4891.42,3558.69) 4929.06,3558.69 ; C12.2@4918.04,3607.36 ccw(c4891.42,3633.97) 4929.06,3633.97 ; C12.2@4918.04,3607.36 ccw(c4891.42,3633.97) 4929.06,3633.97 ; C12.2@4918.04,3607.36 ccw(c4891.42,3633.97) 4929.06,3633.97 ; C12.2@4918.04,3607.36 ccw(c4891.42,3633.97) 4929.06,3633.97 ; 4929.06,3508.64 ccw(c4966.7,3508.64) C13.A@4940.09,3482.02 ; 4929.06,3508.64 ccw(c4966.7,3508.64) C13.A@4940.09,3482.02 ; 4929.06,3508.64 ccw(c4966.7,3508.64) C13.A@4940.09,3482.02 ; 4929.06,3508.64 ccw(c4966.7,3508.64) C13.A@4940.09,3482.02 ; 4929.06,3558.69 cw(c4966.7,3558.69) C12.2@4940.09,3585.31 ; 4929.06,3558.69 cw(c4966.7,3558.69) C12.2@4940.09,3585.31 ; 4929.06,3558.69 cw(c4966.7,3558.69) C12.2@4940.09,3585.31 ; 4929.06,3558.69 cw(c4966.7,3558.69) C12.2@4940.09,3585.31 ; 4929.06,3633.97 ccw(c4966.7,3633.97) C12.2@4940.09,3607.36 ; 4929.06,3633.97 ccw(c4966.7,3633.97) C12.2@4940.09,3607.36 ; 4929.06,3633.97 ccw(c4966.7,3633.97) C12.2@4940.09,3607.36 ; 4929.06,3633.97 ccw(c4966.7,3633.97) C12.2@4940.09,3607.36 ; C13.A@4943.04,3459.98 cw(c4975.76,3427.25) 4975.76,3473.53 ; C13.A@4943.04,3459.98 cw(c4975.76,3427.25) 4975.76,3473.53 ; C13.A@4943.04,3459.98 cw(c4975.76,3427.25) 4975.76,3473.53 ; C13.A@4943.04,3482.02 ccw(c4963.55,3502.53) 4963.55,3473.53 ; C13.A@4943.04,3482.02 ccw(c4963.55,3502.53) 4963.55,3473.53 ; C13.A@4943.04,3482.02 ccw(c4963.55,3502.53) 4963.55,3473.53 ; 4975.76,3473.53 5041.39,3473.53 ; 5041.39,3473.53 cw(c5041.39,3454.9) U3.2@5054.56,3468.07 ; 5041.39,3473.53 ccw(c5041.39,3492.16) U3.2@5054.56,3478.99 ; 5041.39,3473.53 cw(c5041.39,3454.9) U3.2@5054.56,3468.07 ; 5041.39,3473.53 ccw(c5041.39,3492.16) U3.2@5054.56,3478.99 ; 5041.39,3473.53 cw(c5041.39,3454.9) U3.2@5054.56,3468.07 ; 5041.39,3473.53 ccw(c5041.39,3492.16) U3.2@5054.56,3478.99 ; 5041.39,3473.53 ccw(c5041.39,3492.16) U3.2@5054.56,3478.99 ; 5041.39,3473.53 cw(c5041.39,3454.9) U3.2@5054.56,3468.07 ; 5041.39,3473.53 ccw(c5041.39,3492.16) U3.2@5054.56,3478.99 ; 5041.39,3473.53 cw(c5041.39,3454.9) U3.2@5054.56,3468.07
  Bottom Layer w10: v1(4137,3176) 4328,3367 VCC2---VCC1.4@4328,3567 ; v1(5050,2910) 5156,3016 5156,3228 v1(5151,3233) ; v1@5143.93,3225.93 cw(c5114.79,3196.79) 5156,3196.79 ; 4154.07,3193.07 cw(c4137,3210.14) 4137,3186 ccw(c4137,3210.14) 4154.07,3193.07 ; 4154.07,3193.07 ccw(c4171.14,3176) 4147,3176 cw(c4171.14,3176) 4154.07,3193.07 ; 4328,3501.64 cw(c4388.36,3501.64) 4345.68,3544.32 ccw(c4388.36,3501.64) 4328,3501.64 ; 4328,3501.64 ccw(c4267.64,3501.64) 4310.32,3544.32 cw(c4267.64,3501.64) 4328,3501.64 ; 4328,3525.79 cw(c4364.21,3525.79) 4338.61,3551.39 ccw(c4364.21,3525.79) 4328,3525.79 ; 4328,3525.79 ccw(c4291.79,3525.79) 4317.39,3551.39 cw(c4291.79,3525.79) 4328,3525.79 ; v1@5050,2920 ccw(c5050,2944.14) 5067.07,2927.07 ; v1@5050,2920 ccw(c5050,2944.14) 5067.07,2927.07 ; v1@5050,2920 ccw(c5050,2944.14) 5067.07,2927.07 ; v1@5050,2920 ccw(c5050,2944.14) 5067.07,2927.07 ; v1@5060,2910 cw(c5084.14,2910) 5067.07,2927.07 ; v1@5060,2910 cw(c5084.14,2910) 5067.07,2927.07 ; v1@5060,2910 cw(c5084.14,2910) 5067.07,2927.07 ; v1@5060,2910 cw(c5084.14,2910) 5067.07,2927.07
W_CE: SPI:W_CSN-SCK-MISO-MOSI-W_IRQ-W_CE.6 U1.21 | length 2390.7
  Top Layer w8: U1.21@4835.38,2290.57 4835.38,2240.63 4881.01,2195 5452,2195 SPI:W_CSN-SCK-MISO-MOSI-W_IRQ-W_CE.6@5553,2094 ; 5500.08,2146.92 ccw(c5553,2199.84) SPI:W_CSN-SCK-MISO-MOSI-W_IRQ-W_CE.6@5553,2125 ; 5500.08,2146.92 ccw(c5553,2199.84) SPI:W_CSN-SCK-MISO-MOSI-W_IRQ-W_CE.6@5553,2125 ; 5500.08,2146.92 ccw(c5553,2199.84) SPI:W_CSN-SCK-MISO-MOSI-W_IRQ-W_CE.6@5553,2125 ; 5500.08,2146.92 ccw(c5553,2199.84) SPI:W_CSN-SCK-MISO-MOSI-W_IRQ-W_CE.6@5553,2125 ; 5500.08,2146.92 ccw(c5553,2199.84) SPI:W_CSN-SCK-MISO-MOSI-W_IRQ-W_CE.6@5553,2125 ; 5500.08,2146.92 ccw(c5553,2199.84) SPI:W_CSN-SCK-MISO-MOSI-W_IRQ-W_CE.6@5553,2125 ; 5500.08,2146.92 ccw(c5553,2199.84) SPI:W_CSN-SCK-MISO-MOSI-W_IRQ-W_CE.6@5553,2125 ; 5500.08,2146.92 ccw(c5553,2199.84) SPI:W_CSN-SCK-MISO-MOSI-W_IRQ-W_CE.6@5553,2125 ; 5512.15,2134.85 cw(c5476.3,2099) SPI:W_CSN-SCK-MISO-MOSI-W_IRQ-W_CE.6@5527,2099 ; 5512.15,2134.85 cw(c5476.3,2099) SPI:W_CSN-SCK-MISO-MOSI-W_IRQ-W_CE.6@5527,2099 ; 5512.15,2134.85 cw(c5476.3,2099) SPI:W_CSN-SCK-MISO-MOSI-W_IRQ-W_CE.6@5527,2099 ; 5512.15,2134.85 cw(c5476.3,2099) SPI:W_CSN-SCK-MISO-MOSI-W_IRQ-W_CE.6@5527,2099 ; 5512.15,2134.85 cw(c5476.3,2099) SPI:W_CSN-SCK-MISO-MOSI-W_IRQ-W_CE.6@5527,2099 ; 5512.15,2134.85 cw(c5476.3,2099) SPI:W_CSN-SCK-MISO-MOSI-W_IRQ-W_CE.6@5527,2099 ; 5512.15,2134.85 cw(c5476.3,2099) SPI:W_CSN-SCK-MISO-MOSI-W_IRQ-W_CE.6@5527,2099 ; 5512.15,2134.85 cw(c5476.3,2099) SPI:W_CSN-SCK-MISO-MOSI-W_IRQ-W_CE.6@5527,2099 ; 5513.74,2133.26 ccw(c5553,2172.53) SPI:W_CSN-SCK-MISO-MOSI-W_IRQ-W_CE.6@5553,2117 ; 5513.74,2133.26 ccw(c5553,2172.53) SPI:W_CSN-SCK-MISO-MOSI-W_IRQ-W_CE.6@5553,2117 ; 5513.74,2133.26 ccw(c5553,2172.53) SPI:W_CSN-SCK-MISO-MOSI-W_IRQ-W_CE.6@5553,2117 ; 5513.74,2133.26 ccw(c5553,2172.53) SPI:W_CSN-SCK-MISO-MOSI-W_IRQ-W_CE.6@5553,2117 ; 5513.74,2133.26 ccw(c5553,2172.53) SPI:W_CSN-SCK-MISO-MOSI-W_IRQ-W_CE.6@5553,2117 ; 5513.74,2133.26 ccw(c5553,2172.53) SPI:W_CSN-SCK-MISO-MOSI-W_IRQ-W_CE.6@5553,2117 ; 5513.74,2133.26 ccw(c5553,2172.53) SPI:W_CSN-SCK-MISO-MOSI-W_IRQ-W_CE.6@5553,2117 ; 5513.74,2133.26 ccw(c5553,2172.53) SPI:W_CSN-SCK-MISO-MOSI-W_IRQ-W_CE.6@5553,2117 ; 5525.81,2121.19 cw(c5503.62,2099) SPI:W_CSN-SCK-MISO-MOSI-W_IRQ-W_CE.6@5535,2099 ; 5525.81,2121.19 cw(c5503.62,2099) SPI:W_CSN-SCK-MISO-MOSI-W_IRQ-W_CE.6@5535,2099 ; 5525.81,2121.19 cw(c5503.62,2099) SPI:W_CSN-SCK-MISO-MOSI-W_IRQ-W_CE.6@5535,2099 ; 5525.81,2121.19 cw(c5503.62,2099) SPI:W_CSN-SCK-MISO-MOSI-W_IRQ-W_CE.6@5535,2099 ; 5525.81,2121.19 cw(c5503.62,2099) SPI:W_CSN-SCK-MISO-MOSI-W_IRQ-W_CE.6@5535,2099 ; 5525.81,2121.19 cw(c5503.62,2099) SPI:W_CSN-SCK-MISO-MOSI-W_IRQ-W_CE.6@5535,2099 ; 5525.81,2121.19 cw(c5503.62,2099) SPI:W_CSN-SCK-MISO-MOSI-W_IRQ-W_CE.6@5535,2099 ; 5525.81,2121.19 cw(c5503.62,2099) SPI:W_CSN-SCK-MISO-MOSI-W_IRQ-W_CE.6@5535,2099 ; 5527.39,2119.61 ccw(c5553,2145.21) SPI:W_CSN-SCK-MISO-MOSI-W_IRQ-W_CE.6@5553,2109 ; 5527.39,2119.61 ccw(c5553,2145.21) SPI:W_CSN-SCK-MISO-MOSI-W_IRQ-W_CE.6@5553,2109 ; 5527.39,2119.61 ccw(c5553,2145.21) SPI:W_CSN-SCK-MISO-MOSI-W_IRQ-W_CE.6@5553,2109 ; 5527.39,2119.61 ccw(c5553,2145.21) SPI:W_CSN-SCK-MISO-MOSI-W_IRQ-W_CE.6@5553,2109 ; 5527.39,2119.61 ccw(c5553,2145.21) SPI:W_CSN-SCK-MISO-MOSI-W_IRQ-W_CE.6@5553,2109 ; 5527.39,2119.61 ccw(c5553,2145.21) SPI:W_CSN-SCK-MISO-MOSI-W_IRQ-W_CE.6@5553,2109 ; 5527.39,2119.61 ccw(c5553,2145.21) SPI:W_CSN-SCK-MISO-MOSI-W_IRQ-W_CE.6@5553,2109 ; 5527.39,2119.61 ccw(c5553,2145.21) SPI:W_CSN-SCK-MISO-MOSI-W_IRQ-W_CE.6@5553,2109
W_CSN: SPI:W_CSN-SCK-MISO-MOSI-W_IRQ-W_CE.1 U1.14 | length 1648.8
  Top Layer w8: v1@4675,2171 ccw(c4675,2197.56) 4693.78,2178.78 ccw(c4712.56,2160) v1@4686,2160
  Top Layer w10: v1(4675,2160) 4697.58,2182.58 U1.14@4697.58,2290.57 ; v1@4675,2170 ccw(c4675,2194.14) 4692.07,2177.07 ; v1@4675,2170 ccw(c4675,2194.14) 4692.07,2177.07 ; v1@4675,2170 ccw(c4675,2194.14) 4692.07,2177.07 ; v1@4685,2160 cw(c4709.14,2160) 4692.07,2177.07 ; v1@4685,2160 cw(c4709.14,2160) 4692.07,2177.07 ; v1@4685,2160 cw(c4709.14,2160) 4692.07,2177.07
  Bottom Layer w8: v1(4675,2160) 4987,2160 SPI:W_CSN-SCK-MISO-MOSI-W_IRQ-W_CE.1@5053,2094 ; v1@4682.78,2152.22 cw(c4701.56,2133.44) 4701.56,2160 ; v1@4682.78,2152.22 cw(c4701.56,2133.44) 4701.56,2160 ; v1@4682.78,2152.22 cw(c4701.56,2133.44) 4701.56,2160 ; v1@4682.78,2152.22 cw(c4701.56,2133.44) 4701.56,2160 ; v1@4682.78,2167.78 ccw(c4701.56,2186.56) 4701.56,2160 ; v1@4682.78,2167.78 ccw(c4701.56,2186.56) 4701.56,2160 ; v1@4682.78,2167.78 ccw(c4701.56,2186.56) 4701.56,2160 ; v1@4682.78,2167.78 ccw(c4701.56,2186.56) 4701.56,2160 ; 5000.08,2146.92 ccw(c5053,2199.84) SPI:W_CSN-SCK-MISO-MOSI-W_IRQ-W_CE.1@5053,2125 ; 5000.08,2146.92 ccw(c5053,2199.84) SPI:W_CSN-SCK-MISO-MOSI-W_IRQ-W_CE.1@5053,2125 ; 5000.08,2146.92 ccw(c5053,2199.84) SPI:W_CSN-SCK-MISO-MOSI-W_IRQ-W_CE.1@5053,2125 ; 5000.08,2146.92 ccw(c5053,2199.84) SPI:W_CSN-SCK-MISO-MOSI-W_IRQ-W_CE.1@5053,2125 ; 5012.15,2134.85 cw(c4976.3,2099) SPI:W_CSN-SCK-MISO-MOSI-W_IRQ-W_CE.1@5027,2099 ; 5012.15,2134.85 cw(c4976.3,2099) SPI:W_CSN-SCK-MISO-MOSI-W_IRQ-W_CE.1@5027,2099 ; 5012.15,2134.85 cw(c4976.3,2099) SPI:W_CSN-SCK-MISO-MOSI-W_IRQ-W_CE.1@5027,2099 ; 5012.15,2134.85 cw(c4976.3,2099) SPI:W_CSN-SCK-MISO-MOSI-W_IRQ-W_CE.1@5027,2099 ; 5013.74,2133.26 ccw(c5053,2172.53) SPI:W_CSN-SCK-MISO-MOSI-W_IRQ-W_CE.1@5053,2117 ; 5013.74,2133.26 ccw(c5053,2172.53) SPI:W_CSN-SCK-MISO-MOSI-W_IRQ-W_CE.1@5053,2117 ; 5013.74,2133.26 ccw(c5053,2172.53) SPI:W_CSN-SCK-MISO-MOSI-W_IRQ-W_CE.1@5053,2117 ; 5013.74,2133.26 ccw(c5053,2172.53) SPI:W_CSN-SCK-MISO-MOSI-W_IRQ-W_CE.1@5053,2117 ; SPI:W_CSN-SCK-MISO-MOSI-W_IRQ-W_CE.1@5025.81,2121.19 cw(c5003.62,2099) SPI:W_CSN-SCK-MISO-MOSI-W_IRQ-W_CE.1@5035,2099 ; SPI:W_CSN-SCK-MISO-MOSI-W_IRQ-W_CE.1@5025.81,2121.19 cw(c5003.62,2099) SPI:W_CSN-SCK-MISO-MOSI-W_IRQ-W_CE.1@5035,2099 ; SPI:W_CSN-SCK-MISO-MOSI-W_IRQ-W_CE.1@5025.81,2121.19 cw(c5003.62,2099) SPI:W_CSN-SCK-MISO-MOSI-W_IRQ-W_CE.1@5035,2099 ; SPI:W_CSN-SCK-MISO-MOSI-W_IRQ-W_CE.1@5025.81,2121.19 cw(c5003.62,2099) SPI:W_CSN-SCK-MISO-MOSI-W_IRQ-W_CE.1@5035,2099 ; SPI:W_CSN-SCK-MISO-MOSI-W_IRQ-W_CE.1@5027.39,2119.61 ccw(c5053,2145.21) SPI:W_CSN-SCK-MISO-MOSI-W_IRQ-W_CE.1@5053,2109 ; SPI:W_CSN-SCK-MISO-MOSI-W_IRQ-W_CE.1@5027.39,2119.61 ccw(c5053,2145.21) SPI:W_CSN-SCK-MISO-MOSI-W_IRQ-W_CE.1@5053,2109 ; SPI:W_CSN-SCK-MISO-MOSI-W_IRQ-W_CE.1@5027.39,2119.61 ccw(c5053,2145.21) SPI:W_CSN-SCK-MISO-MOSI-W_IRQ-W_CE.1@5053,2109 ; SPI:W_CSN-SCK-MISO-MOSI-W_IRQ-W_CE.1@5027.39,2119.61 ccw(c5053,2145.21) SPI:W_CSN-SCK-MISO-MOSI-W_IRQ-W_CE.1@5053,2109
W_IRQ: SPI:W_CSN-SCK-MISO-MOSI-W_IRQ-W_CE.5 U1.20 | length 2310.4
  Top Layer w8: U1.20@4815.69,2290.57 4815.69,2240.52 4876.21,2180 5262,2180 5367,2180 SPI:W_CSN-SCK-MISO-MOSI-W_IRQ-W_CE.5@5453,2094 ; 5400.08,2146.92 ccw(c5453,2199.84) SPI:W_CSN-SCK-MISO-MOSI-W_IRQ-W_CE.5@5453,2125 ; 5400.08,2146.92 ccw(c5453,2199.84) SPI:W_CSN-SCK-MISO-MOSI-W_IRQ-W_CE.5@5453,2125 ; 5400.08,2146.92 ccw(c5453,2199.84) SPI:W_CSN-SCK-MISO-MOSI-W_IRQ-W_CE.5@5453,2125 ; 5400.08,2146.92 ccw(c5453,2199.84) SPI:W_CSN-SCK-MISO-MOSI-W_IRQ-W_CE.5@5453,2125 ; 5400.08,2146.92 ccw(c5453,2199.84) SPI:W_CSN-SCK-MISO-MOSI-W_IRQ-W_CE.5@5453,2125 ; 5400.08,2146.92 ccw(c5453,2199.84) SPI:W_CSN-SCK-MISO-MOSI-W_IRQ-W_CE.5@5453,2125 ; 5400.08,2146.92 ccw(c5453,2199.84) SPI:W_CSN-SCK-MISO-MOSI-W_IRQ-W_CE.5@5453,2125 ; 5400.08,2146.92 ccw(c5453,2199.84) SPI:W_CSN-SCK-MISO-MOSI-W_IRQ-W_CE.5@5453,2125 ; 5412.15,2134.85 cw(c5376.3,2099) SPI:W_CSN-SCK-MISO-MOSI-W_IRQ-W_CE.5@5427,2099 ; 5412.15,2134.85 cw(c5376.3,2099) SPI:W_CSN-SCK-MISO-MOSI-W_IRQ-W_CE.5@5427,2099 ; 5412.15,2134.85 cw(c5376.3,2099) SPI:W_CSN-SCK-MISO-MOSI-W_IRQ-W_CE.5@5427,2099 ; 5412.15,2134.85 cw(c5376.3,2099) SPI:W_CSN-SCK-MISO-MOSI-W_IRQ-W_CE.5@5427,2099 ; 5412.15,2134.85 cw(c5376.3,2099) SPI:W_CSN-SCK-MISO-MOSI-W_IRQ-W_CE.5@5427,2099 ; 5412.15,2134.85 cw(c5376.3,2099) SPI:W_CSN-SCK-MISO-MOSI-W_IRQ-W_CE.5@5427,2099 ; 5412.15,2134.85 cw(c5376.3,2099) SPI:W_CSN-SCK-MISO-MOSI-W_IRQ-W_CE.5@5427,2099 ; 5412.15,2134.85 cw(c5376.3,2099) SPI:W_CSN-SCK-MISO-MOSI-W_IRQ-W_CE.5@5427,2099 ; 5413.74,2133.26 ccw(c5453,2172.53) SPI:W_CSN-SCK-MISO-MOSI-W_IRQ-W_CE.5@5453,2117 ; 5413.74,2133.26 ccw(c5453,2172.53) SPI:W_CSN-SCK-MISO-MOSI-W_IRQ-W_CE.5@5453,2117 ; 5413.74,2133.26 ccw(c5453,2172.53) SPI:W_CSN-SCK-MISO-MOSI-W_IRQ-W_CE.5@5453,2117 ; 5413.74,2133.26 ccw(c5453,2172.53) SPI:W_CSN-SCK-MISO-MOSI-W_IRQ-W_CE.5@5453,2117 ; 5413.74,2133.26 ccw(c5453,2172.53) SPI:W_CSN-SCK-MISO-MOSI-W_IRQ-W_CE.5@5453,2117 ; 5413.74,2133.26 ccw(c5453,2172.53) SPI:W_CSN-SCK-MISO-MOSI-W_IRQ-W_CE.5@5453,2117 ; 5413.74,2133.26 ccw(c5453,2172.53) SPI:W_CSN-SCK-MISO-MOSI-W_IRQ-W_CE.5@5453,2117 ; 5413.74,2133.26 ccw(c5453,2172.53) SPI:W_CSN-SCK-MISO-MOSI-W_IRQ-W_CE.5@5453,2117 ; 5425.81,2121.19 cw(c5403.62,2099) SPI:W_CSN-SCK-MISO-MOSI-W_IRQ-W_CE.5@5435,2099 ; 5425.81,2121.19 cw(c5403.62,2099) SPI:W_CSN-SCK-MISO-MOSI-W_IRQ-W_CE.5@5435,2099 ; 5425.81,2121.19 cw(c5403.62,2099) SPI:W_CSN-SCK-MISO-MOSI-W_IRQ-W_CE.5@5435,2099 ; 5425.81,2121.19 cw(c5403.62,2099) SPI:W_CSN-SCK-MISO-MOSI-W_IRQ-W_CE.5@5435,2099 ; 5425.81,2121.19 cw(c5403.62,2099) SPI:W_CSN-SCK-MISO-MOSI-W_IRQ-W_CE.5@5435,2099 ; 5425.81,2121.19 cw(c5403.62,2099) SPI:W_CSN-SCK-MISO-MOSI-W_IRQ-W_CE.5@5435,2099 ; 5425.81,2121.19 cw(c5403.62,2099) SPI:W_CSN-SCK-MISO-MOSI-W_IRQ-W_CE.5@5435,2099 ; 5425.81,2121.19 cw(c5403.62,2099) SPI:W_CSN-SCK-MISO-MOSI-W_IRQ-W_CE.5@5435,2099 ; 5427.39,2119.61 ccw(c5453,2145.21) SPI:W_CSN-SCK-MISO-MOSI-W_IRQ-W_CE.5@5453,2109 ; 5427.39,2119.61 ccw(c5453,2145.21) SPI:W_CSN-SCK-MISO-MOSI-W_IRQ-W_CE.5@5453,2109 ; 5427.39,2119.61 ccw(c5453,2145.21) SPI:W_CSN-SCK-MISO-MOSI-W_IRQ-W_CE.5@5453,2109 ; 5427.39,2119.61 ccw(c5453,2145.21) SPI:W_CSN-SCK-MISO-MOSI-W_IRQ-W_CE.5@5453,2109 ; 5427.39,2119.61 ccw(c5453,2145.21) SPI:W_CSN-SCK-MISO-MOSI-W_IRQ-W_CE.5@5453,2109 ; 5427.39,2119.61 ccw(c5453,2145.21) SPI:W_CSN-SCK-MISO-MOSI-W_IRQ-W_CE.5@5453,2109 ; 5427.39,2119.61 ccw(c5453,2145.21) SPI:W_CSN-SCK-MISO-MOSI-W_IRQ-W_CE.5@5453,2109 ; 5427.39,2119.61 ccw(c5453,2145.21) SPI:W_CSN-SCK-MISO-MOSI-W_IRQ-W_CE.5@5453,2109
pads on no net: U1.2 U1.3 U1.4 U1.22 U1.29 U1.32 U1.33 U1.45 U1.46 U4.2 U4.3 U4.4 U4.5 U4.14 U4.15 U4.16 U4.17 U4.19 U4.21 U4.22 U5.3 U5.5 U5.6 U5.7 U5.14 U5.15
copper on no net:
  other v2: 4042,1991 5762,1991 3982.88,2014.88 4101.12,2014.88 5702.88,2014.88 5821.12,2014.88 3959,2074 4125,2074 5679,2074 5845,2074 3982.88,2133.12 4101.12,2133.12 5702.88,2133.12 5821.12,2133.12 4042,2157 5762,2157 4044,3708 5761,3710 3984.88,3731.88 4103.12,3731.88 5701.88,3733.88 5820.12,3733.88 3961,3791 4127,3791 5678,3793 5844,3793 3984.88,3850.12 4103.12,3850.12 5701.88,3852.12 5820.12,3852.12 4044,3874 5761,3876
  other v4: 4042,2074 5762,2074 4044,3791 5761,3793

## Polygon pours and split planes (outlines as drawn)
GND on Top Layer "top Layer-GND" (solid, remove dead copper, pour order 1000): 3791.08,4037.74 5968.08,4037.74 6020.08,3985.74 5986.08,3951.74 5986.08,1847.74 3787.08,1847.74 3748.08,1886.74
GND on Bottom Layer "top Layer-GND" (solid, remove dead copper, pour order 1001): 3832.9,4039.85 3846.9,4025.85 5993.9,4025.85 5993.9,1993.85 5940.9,1940.85 3836.9,1940.85

## Keep-outs
Keep-Out Layer:
  the board outline again, w10

## Other copper
Top Layer:
  text "2013.12.3" at 4507,3338 h25

## Silkscreen, mask and mechanical layers (free items; w line width, h text height)
Top Overlay:
  lines w10: 4302,2999 4326,3023 4326,2826.15 ; 4327,3023 4351,2999 ; 4329,2826 4525.85,2826 ; 4501,2801 4525,2825 ; 4501,2851 4525,2827
  text "-" at 5518,3847 h30
  text "+" at 5208,3842 h30
  text "-" at 5099,3839 h30
  text "-" at 3976,3556 h30
  text "Spacelan" at 4408,3374 h40
  text "Y" at 4377,2994 h25
  text "X" at 4499,2753 h25
  text "-" at 5807,2268 h30
  text "-" at 4167,2076 h30